# Altium PCB IMU_Pcb.PcbDoc
Units mil, origin at the board's own origin, x right, y up, seen from the top; angles counter-clockwise.
Board outline 530 x 460 mil, 2 copper layers (Top Layer, Bottom Layer); 20 components, 10 nets, 59 pads, 13 vias.
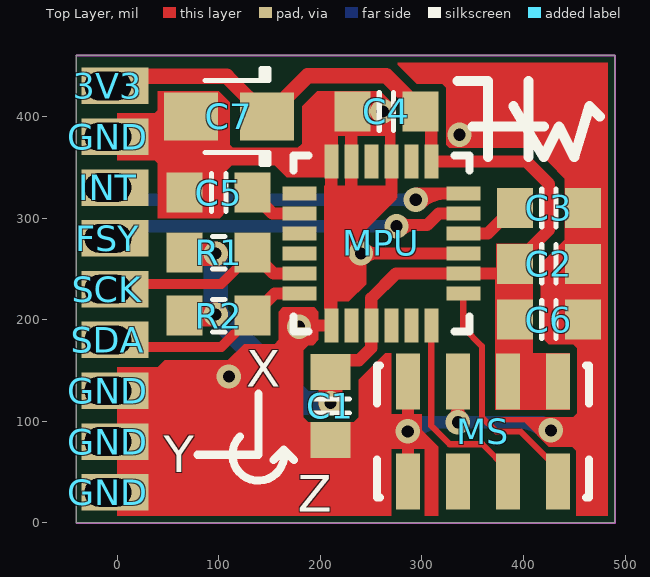
[diagram p0: Top Layer view]
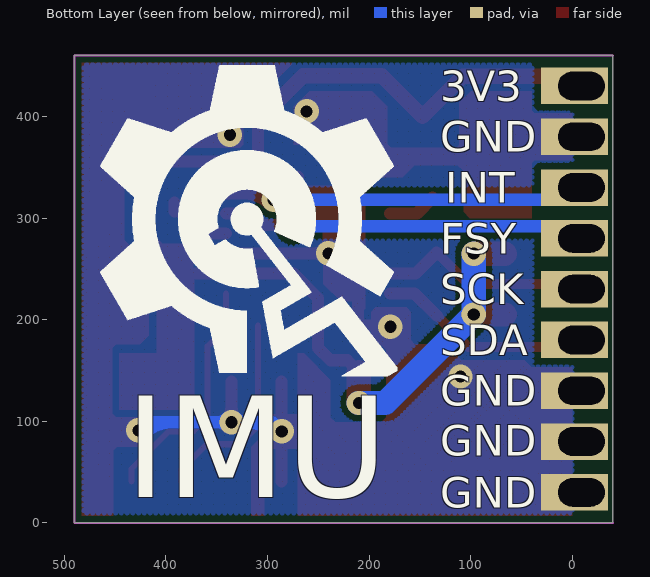
[diagram p1: Bottom Layer view, seen from below]
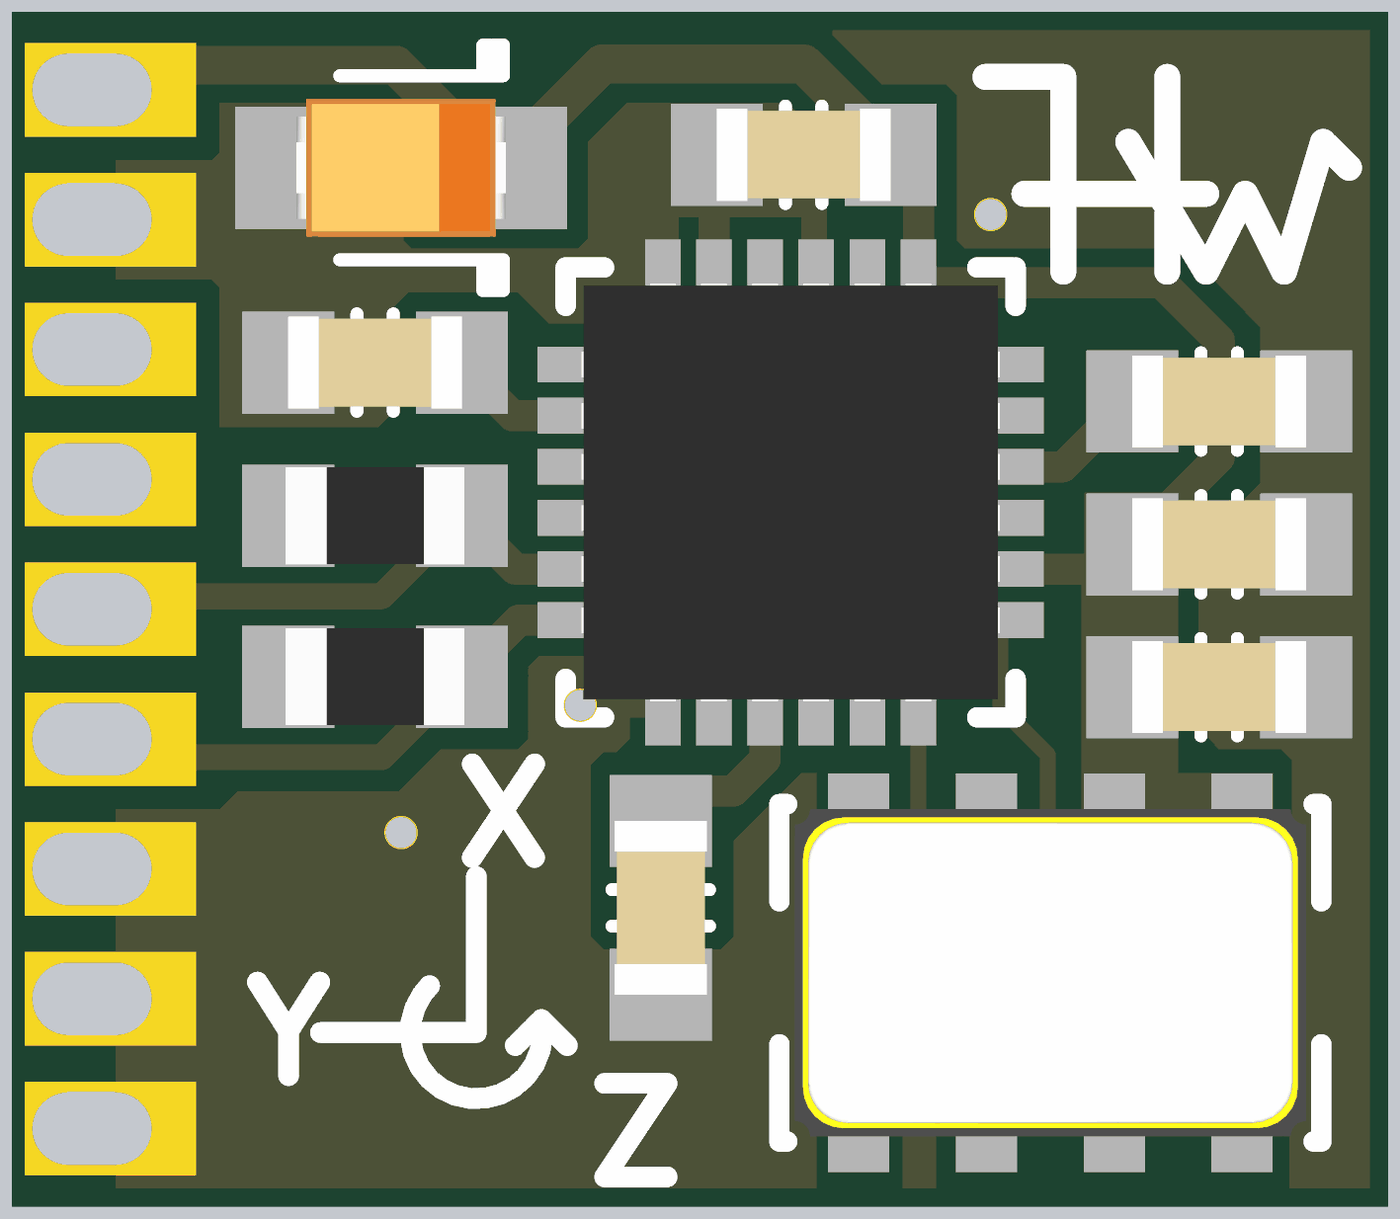
[diagram p2: 3D render of the assembled board from above, using the file's embedded part models]

## Layer stack, top to bottom
Top Layer: signal copper 1.4
Dielectric: dielectric 12.6, FR-4, Dk 4.8
Bottom Layer: signal copper 1.4

## Board outline
-40,460 490,460 490,1 490,0 -40,0

## Design rules (kind name [scope] priority, off if disabled: settings)
Clearance ClearancePolygon [InPolygon] p1: gap=6
Clearance [All] p2: gap=5
ComponentClearance [All] p1: gap=0 collisioncheckmode=3 verticalgap=0 showdistances=FALSE
HoleToHoleClearance [All] p1: gap=6 allowstackedmicrovias=TRUE
MinimumSolderMaskSliver [All] p1: minsoldermaskwidth=5
PlaneConnect [All] p1: planeconnectstyle=Direct reliefexpansion=20 reliefentries=4 reliefconductorwidth=10 reliefairgap=10
PolygonConnect [All] p1: connectstyle=Direct reliefconductorwidth=10 reliefentries=4 polygonreliefangle="90 Angle" airgapwidth=10
RoutingVias [All] p1: holewidth=12 width=20 viastyle="Through Hole" minholewidth=12 minwidth=20 maxholewidth=28 maxwidth=50
SilkToSilkClearance [All] p1: silktosilkclearance=0
SilkToSolderMaskClearance [IsPad] p1: minsilkscreentomaskgap=2 clearancetoexposedcopper=TRUE
SolderMaskExpansion [All] p1: expansion=0
Width [All] p1: maxlimit=24 minlimit=6 preferedwidth=10
22 further rules are at their usual default settings.

## Components (designator, comment, footprint, x,y, rotation, side; value= is the part's Value field where it differs from the comment)
3V3 "Pad1X1_1.27" Pad1X1_1.27#1 -9,430 r0 top
C1 "Cap_0603" CAP_0603 210,115 r90 top
C2 "Cap_0603" CAP_0603 425,255 r180 top
C3 "Cap_0603" CAP_0603 425,310 r180 top
C4 "Cap_0603" CAP_0603 265,405 r0 top
C5 "Cap_0603" CAP_0603 100,325 r180 top
C6 "Cap_0603" CAP_0603 425,200 r0 top
C7 "Cap_Tan_0805" CAP_TAN_P0805 110,400 r180 top
FSY "Pad1X1_1.27" Pad1X1_1.27#1 -9,280 r0 top
GND "Pad1X1_1.27" Pad1X1_1.27#1 -9,30 r0 top (schematic designator GND3)
GND "Pad1X1_1.27" Pad1X1_1.27#1 -9,380 r0 top
GND "Pad1X1_1.27" Pad1X1_1.27#2 -12,130 r0 top (schematic designator GND1)
GND "Pad1X1_1.27" Pad1X1_1.27#3 -10,80 r0 top (schematic designator GND2)
INT "Pad1X1_1.27" Pad1X1_1.27#1 -9,330 r0 top
MPU "MPU9150" MPU9150 260,275 r90 top
MS "MS5611" MS5611 360,90 r270 top
R1 "Res_0603" RES_0603 100,266 r0 top
R2 "Res_0603" RES_0603 100,204 r0 top
SCK "Pad1X1_1.27" Pad1X1_1.27#1 -9,230 r0 top
SDA "Pad1X1_1.27" Pad1X1_1.27#1 -9,180 r0 top

## Footprints (in the part's own frame and the unit in brackets; to place one, negate y for a bottom-side part, rotate by r counter-clockwise, add the part's x,y. Pads: shape width x height; smd on the part's side, far side on the other; paste and mask are expansions set on the pad)
CAP_0603 [mm] "Chip Capacitor, Body 1.6x0.8mm, 0603, IPC Medium Density"
  rect 0.9x1 smd: 1(-0.85,0) 2(0.85,0)
  Top Layer pour cut-out: -0.4,0.6 0.4,0.6 0.4,-0.6 -0.4,-0.6
  silkscreen extent -0.18,-0.48 0.18,0.48, body extent -0.85,-0.45 0.85,0.45, height 0.89
CAP_TAN_P0805 [mm] "Molded body capacitor, Body 2.0x1.2mm, 0805, IPC Medium Density"
  rect 1.35x1.2 smd: 1(-0.95,0) 2(0.95,0)
  Top Layer pour cut-out: -0.4,0.8 0.4,0.8 0.4,-0.8 -0.4,-0.8
  silkscreen extent -1,-1.2 0.6,1.2, body extent -1.02,-0.67 1.03,0.68, height 1.5
MPU9150 [mm] "QFN, 24-Leads, Body 4.00x4.00mm, Pitch 0.50mm, IPC Medium Density"
  rect 0.85x0.35 smd: 1(-2.05,1.25) 2(-2.05,0.75) 3(-2.05,0.25) 4(-2.05,-0.25) 5(-2.05,-0.75) 6(-2.05,-1.25) 13(2.05,-1.25) 14(2.05,-0.75) 15(2.05,-0.25) 16(2.05,0.25) 17(2.05,0.75) 18(2.05,1.25)
  rect 0.35x0.85 smd: 7(-1.25,-2.05) 8(-0.75,-2.05) 9(-0.25,-2.05) 10(0.25,-2.05) 11(0.75,-2.05) 12(1.25,-2.05) 19(1.25,2.05) 20(0.75,2.05) 21(0.25,2.05) 22(-0.25,2.05) 23(-0.75,2.05) 24(-1.25,2.05)
  silkscreen extent -2.2,-2.2 2.2,2.2, body extent -2.04,-2.04 2.05,2.05, height 0.8
MS5611 [mm] "QFN, 8-Leads, Body 5.00x3.00mm, Pitch 1.25mm/0.00mm, Thermal Pad 4.35x0.00mm, IPC Medium Density"
  rect 1.4x0.6 smd: 1(-1.25,1.875) 2(-1.25,0.625) 3(-1.25,-0.625) 4(-1.25,-1.875) 5(1.25,-1.875) 6(1.25,-0.625) 7(1.25,0.625) 8(1.25,1.875)
  silkscreen extent -1.65,-2.65 1.65,2.65, body extent -1.6,-2.5 1.6,2.5, height 1
Pad1X1_1.27#1 [mil] "Connector; Header; 2 Position"
  rect 66x36 hole 28 slot 46 at 0 deg copper offset 7,0: 1(0,0)
Pad1X1_1.27#2 [mil] "Connector; Header; 2 Position"
  rect 66x36 hole 28 slot 46 at 0 deg copper offset 7,0: 1(3,0)
Pad1X1_1.27#3 [mil] "Connector; Header; 2 Position"
  rect 66x36 hole 28 slot 46 at 0 deg copper offset 7,0: 1(1,0)
RES_0603 [mm]
  rect 0.9x1 smd: 1(-0.85,0) 2(0.85,0)
  Top Layer pour cut-out: -0.4,0.6 0.4,0.6 0.4,-0.6 -0.4,-0.6
  silkscreen extent -0.15,-0.41 0.15,0.41, body extent -0.87,-0.47 0.88,0.48, height 0.54

## Part data
3V3 FSY GND GND GND GND INT SCK SDA: "Header"
C1 C2 C3 C4 C5 C6 C7: "Capacitor"
MPU MS: "Sensor"
R1 R2: "Resistor"

## Via types
v1: diameter 24, hole 12, Top Layer to Bottom Layer, 13 vias

## Nets (pads, with @x,y where several pads share a name; then routed paths per layer and width w, separated by ;. In a path a pad name is that pad's centre, name@x,y a point inside that pad or via, vN(x,y) a via of type N, cw(c..) or ccw(c..) an arc to the next point about the centre after c; other vN are vias at no path point)
3V3: 3V3.1 C1.2 C2.2 C4.2 C6.1 C7.1 MPU.3 MPU.8 MPU.13 MS.1 MS.2 R1.1 R2.1 | length 1173.1
  Top Layer w12: C1.2 221.54,160 238,160 250.16,172.16 MPU.3 250.16,221.16 274.47,245.47 MPU.8 377.01,245.47 C2.2@391.54,260 ; C4.2@309.21,389.25 MPU.13 402.91,355.71 425,333.62 425,288.46 C2.2
  Top Layer w15: 3V3.1 0.5,439.5 107.9,439.5 C7.1 187.4,440 265,440 C4.2@303.5,401.5
  Top Layer w24: R2.1@66.54,205 v1(97,205) ; R1.1@66.54,265 v1(97,265) ; v1(210,118) C1.2
  Bottom Layer w24: v1(97,265) v1(97,205) 184,118 v1(210,118)
CPOUT: C5.1 MPU.20 | length 48.2
  Top Layer w12: C5.1@137.46,320 152.94,304.53 MPU.20
ES_CL: MPU.7 MS.8 | length 237.6
  Top Layer w6: MPU.7 340.71,192.29 359,174 359,104 373,90 397,90 433.82,53.18 MS.8
ES_DA: MPU.6 MS.7 | length 203.7
  Top Layer w6: MPU.6 309.21,95.48 327.35,77.35 359.65,77.35 384.61,52.39 MS.7
FSY: FSY.1 MPU.11 | length 405
  Top Layer w12: v1@275,293 305,293 316.53,304.53 MPU.11 ; v1@279.24,287.76 cw(c291.9,275.1) 291.9,293 ; v1@279.24,296.24 ccw(c287.07,304.07) 287.07,293
  Bottom Layer w12: FSY.1 3,292 v1(275,292) ; v1@270.76,287.76 ccw(c260.51,277.51) 260.51,292 ccw(c260.51,306.49) v1@270.76,296.24
GND: C1.1 C2.1 C3.1 C4.1 C5.2 C6.2 C7.2 GND.1 MPU.1 MPU.9 MPU.15 MPU.17 MPU.18 MS.3 MS.4 MS.5 | length 2279.5
  Top Layer w10: C4.1@230.47,403.94 C4.1
  Top Layer w12: GND.1@-12,130 96,130 v1(110,144) 134,144 169,109 ; GND.1@-12,380 52.6,380 C7.2@71.54,398.94 ; C5.2@71.54,325 71.54,360 ; C7.2 C7.2@71.54,398.94 ; v1@104,144 cw(c89.51,144) 99.76,133.76 cw(c110,123.51) v1@110,138 ; v1@114.24,139.76 cw(c124.49,129.51) 124.49,144 cw(c124.49,158.49) v1@114.24,148.24 ; 169,154.37 cw(c217.63,154.37) 183.24,188.76 cw(c196.6,175.4) 196.6,194.29 ; 169,183.34 cw(c188.66,183.34) v1@174.76,197.24 ; v1@173,192.9 cw(c159.34,192.66) 169,183 ; v1@178.9,187 ccw(c178.66,173.34) 169,183 ; C4.1@230.47,403.94 MPU.17 230.47,302.53 ; C4.1 v1(261.46,405) ; v1@234,265.16 cw(c219.51,265.16) 229.76,254.91 cw(c240,244.67) v1@240,259.16 ; v1@235.76,269.4 ccw(c225.51,279.64) 240,279.64 ccw(c254.49,279.64) 244.24,269.4 ccw(c254.49,279.64) 254.49,265.16 ccw(c254.49,250.67) v1@244.24,260.91 ; 240,293 230.47,302.53 ; 251.08,81.54 ccw(c251.08,124.92) 281.76,94.24 ccw(c271.08,104.92) 286.18,104.92 ; v1@257.22,400.76 ccw(c246.98,390.51) 246.98,405 ccw(c246.98,419.49) v1@257.22,409.24 ; MPU.15@270,340.71 270,322 240,292 v1(240,265.16) ; v1@281.76,85.76 cw(c271.08,75.08) 286.18,75.08 ; v1@284.65,81.54 C1.1 196.46,81.54 169,109 ; MS.5 MS.4 ; 286.18,75.95 cw(c300.05,75.95) v1@290.24,85.76 ; 286.18,104.05 ccw(c300.05,104.05) v1@290.24,94.24 ; v1@331.15,103.24 ccw(c320.91,113.48) 335.39,113.48 ccw(c349.88,113.49) v1@339.64,103.24 ; v1(335.39,99) MS.3 ; v1(337,382) 433,382 458.46,356.54 C3.1 C2.1 C6.2 ; MPU.9 v1(240,265.16) ; v1@341.24,377.76 cw(c351.49,367.51) 351.49,382 cw(c351.49,396.49) v1@341.24,386.24 ; 71.54,360 C7.2@71.54,398.94 ; 71.54,360 210.79,360 210.79,322.21 230.47,302.53 ; 169,109 169,183 ; 169,183 180.29,194.29 MPU.1 210.79,235.94 v1(240,265.16)
  Bottom Layer w12: v1(286,90) 295,99 v1(335.39,99) 419,99 v1(427,91) ; v1@290.24,85.76 cw(c322.21,53.79) 322.21,99 ; v1@331.15,94.76 ccw(c320.91,84.51) 320.91,99 ccw(c320.91,113.49) v1@331.15,103.24 ; v1@339.64,94.76 cw(c349.88,84.51) 349.88,99 cw(c349.88,113.49) v1@339.64,103.24 ; 393.2,99 cw(c393.2,57.2) v1@422.76,86.76
  other v1: 179,193
INT: INT.1 MPU.12 | length 405.3
  Top Layer w12: v1@294.21,324.21 MPU.12 ; v1@298.24,313.76 cw(c323.48,288.52) 323.48,324.21
  Bottom Layer w12: INT.1 3,318 v1(294,318) ; v1@289.76,313.76 ccw(c279.51,303.51) 279.51,318 ccw(c279.51,332.49) v1@289.76,322.24
REGO: C3.2 MPU.10 | length 63.3
  Top Layer w12: MPU.10 364.84,284.84 C3.2@386.54,306.54 ; C3.2@391.54,306.54 C3.2@391.54,315
SCK: MPU.23 R1.2 SCK.1 | length 200.6
  Top Layer w10: SCK.1@0,235 102.46,235 R1.2
  Top Layer w12: R1.2 153.99,245.47 MPU.23
SDA: MPU.24 R2.2 SDA.1 | length 201.2
  Top Layer w10: SDA.1@0,173 102.46,173 R2.2
  Top Layer w12: R2.2 155.25,225.79 MPU.24
pads on no net: MPU.2 MPU.4 MPU.5 MPU.14 MPU.16 MPU.19 MPU.21 MPU.22 MS.6

## Polygon pours and split planes (outlines as drawn)
GND on Bottom Layer "Top Layer-No Net" (hatched 45Degree grid 4 track 4, remove dead copper, pour order 2): -40,460 490,460 490,0 -40,0

## Keep-outs
Keep-Out Layer:
  lines w2: -40,0 490,0 490,460 -40,460

## Other copper
Top Layer:
  rectangle net 3V3: 372,111 446,167
  rectangle net 3V3: 372,111 409.25,242
  rectangle net 3V3: 373,185 409.25,275
  rectangle net GND: 202,381 249.25,425
  pour cut-out: -40,460 0,460 0,0 -40,0
  region net GND: 204,332 270,332 270,323 245,300 245,235 228,218 210.79,218 210.79,210 204,210
  region net GND: 276,453 276,451 295,432 320,432 324,428 324,372 327,369 411,369 440.75,338.62 440.75,278.62 417,254.87 417,184.38 425,176 449,176 453,172 453,108 449,104 374,104 374,102 377,99 401,99 425,75 448,75 452,71 452,7 483,7 483,453
  region net GND: 155,352 167,340 217,340 217,381 264,381 264,372 274,372 274,410 259,425 197,425 182,410 182,373 178,369 114,369 111,372 111,414 100,425 40,425 40,406 37,403 0,403 0,357 37,357 40,354 40,300 101,300 107,306 107,346 113,352
  region net GND: 40,153 47,160 109,160 125,176 155,176 159,180 159,208 163,212 194,212 198,208 198,180 193,175 188,175 183,170 183,104 188,99 233,99 238,104 238,141 264,167 270,167 270,107 300,107 300,91 316,75 316,7 303,7 303,73 270,73 270,7 0,7 0,153
Bottom Layer:
  pour cut-out: -40,460 0,460 0,0 -40,0

## Silkscreen, mask and mechanical layers (free items; w line width, h text height)
Top Overlay:
  lines w8: 79,67 139,67 139,127 ; 120.97,85.03 ccw(c139,67) 164,72 ; 154,62 164,72 ; 174,62 164,72
  lines w10: 335,435 365,435 365,360 ; 350,390 420,390 ; 390,410 420,360 435,390 450,360 465,410 475,400 ; 405,360 405,435
  text "X" at 127,134 h36
  text "Y" at 46,50 h36
  text "Z" at 178,11 h36
Bottom Overlay:
  drawing of 3067 lines, arcs and shapes, not listed
  text "IMU" at 440,25 h100
Mechanical 1:
  lines w0: -40,0 490,0 490,460 -40,460 -40,0

## Dimensions
-40,460 to -40,0 on Mechanical 13
-40,460 to 490,460 on Mechanical 13